# EAGLE board uln_0.02 (EAGLE 8.0.0)
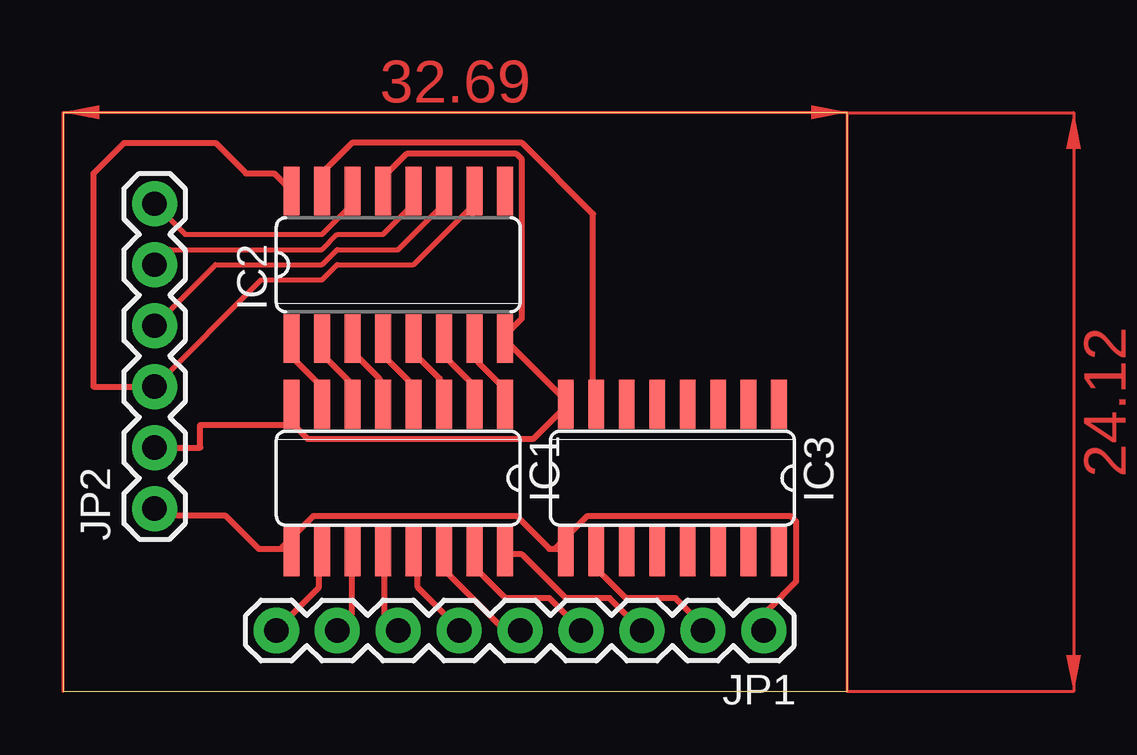
[diagram p0: board, top side]

Size 32.69 x 24.12 mm. Coordinates in mm from the lower left corner, seen from the top.
Outline: 0,0 32.69,0 32.69,24.12 0,24.12 0,0
Copper layers (1*16): Top 0.035mm / dielectric 1.5mm / Bottom 0.035mm
Design rules "SparkFun": minimum track width 8mil, minimum drill 20mil, track to track 8mil, track to pad 8mil, pad to pad 8mil, via to via 8mil, smd to smd 8mil, copper to edge 8mil, drill to drill 8mil, minimum pad ring 12mil, minimum via ring 10mil, stop-mask expansion 4mil, vias tented up to drill 20mil, thermal gap 10mil

## Footprints (pad centres in the part's own frame; a part is rotated, then mirrored left to right if it is on the bottom)
SO16 = smd 0.66 x 2.032: 1 -4.445,-3.073; 2 -3.175,-3.073; 3 -1.905,-3.073; 4 -0.635,-3.073; 5 0.635,-3.073; 6 1.905,-3.073; 7 3.175,-3.073; 8 4.445,-3.073; 9 4.445,3.073; 10 3.175,3.073; 11 1.905,3.073; 12 0.635,3.073; 13 -0.635,3.073; 14 -1.905,3.073; 15 -3.175,3.073; 16 -4.445,3.073
1X09 = drill 1.016 pad 1.88: 1 0,0; 2 2.54,0; 3 5.08,0; 4 7.62,0; 5 10.16,0; 6 12.7,0; 7 15.24,0; 8 17.78,0; 9 20.32,0
1X06 = drill 1.016 pad 1.88: 1 0,0; 2 2.54,0; 3 5.08,0; 4 7.62,0; 5 10.16,0; 6 12.7,0

## Placement (x,y rotation side)
IC1  ULN2003AD  [SO16]  13.97,8.89 180 top
IC2  74HC595D  [SO16]  13.97,17.78 0 top
IC3  ULN2003AD  [SO16]  25.4,8.89 180 top
JP1  M09  [1X09]  29.21,2.54 180 top
JP2  [1X06]  3.81,7.62 90 top

## Library data of the parts
IC1 IC3 = uln-udn
IC2 = 74xx-eu
JP1 JP2 = SparkFun

## Nets
5V: IC2.10 IC2.16 JP2.3
GND: IC1.8 IC2.8 IC2.13 IC3.8 JP2.2
N$1: IC1.7 IC2.1
N$2: IC1.6 IC2.2
N$3: IC1.5 IC2.3
N$4: IC1.4 IC2.4
N$5: IC1.3 IC2.5
N$6: IC1.2 IC2.6
N$7: IC1.1 IC2.7
N$8: IC2.15 IC3.7
N$9: IC1.10 JP1.9
N$10: IC1.11 JP1.8
N$11: IC1.12 JP1.7
N$12: IC1.13 JP1.6
N$13: IC1.14 JP1.5
N$14: IC1.15 JP1.4
N$15: IC1.16 JP1.3
N$16: IC3.10 JP1.2
N$17: IC2.11 JP2.4
N$18: IC2.12 JP2.5
N$19: IC2.14 JP2.6
VCC: IC1.9 IC3.9 JP1.1 JP2.1

## Tracks (layer width: path | path; a pad name or v marks a point on that pad's centre or on a via)
5V
  Top 0.203: JP2.3 8.26,17.14 10.79,17.14 11.43,17.78 14.61,17.78 17.14,20.32 IC2.10
  Top 0.254: JP2.3 1.27,12.7 1.27,21.59 2.54,22.86 6.35,22.86 7.62,21.59 8.79,21.59 IC2.16 | 17.07,19.89 17.07,20.8 IC2.10 17.07,19.89
GND
  Top 0.254: 9.53,12.12 IC1.8 | IC2.13 13.41,21.03 13.41,21.49 14.33,22.4 18.9,22.4 19.13,22.17 19.13,15.54 18.44,14.86 IC2.8 18.44,14.63 20.95,12.12 IC3.8 20.95,11.89 19.58,10.52 10.21,10.52 9.53,11.2 IC1.8 | IC1.8 9.53,11.11 5.71,11.11 5.71,10.16 JP2.2
N$1
  Top 0.254: IC2.1 9.53,13.95 10.67,12.8 10.67,12.12 IC1.7
N$2
  Top 0.254: IC1.6 12.04,12.12 12.04,12.8 10.9,13.95 10.9,14.63 IC2.2
N$3
  Top 0.254: IC1.5 13.18,12.12 13.18,13.03 12.27,13.95 12.27,14.63 IC2.3
N$4
  Top 0.254: IC1.4 14.55,12.12 14.55,12.8 13.41,13.95 13.41,14.63 IC2.4
N$5
  Top 0.254: IC1.3 15.7,12.12 15.7,13.03 14.78,13.95 14.78,14.63 IC2.5
N$6
  Top 0.254: IC2.6 15.93,14.63 15.93,13.95 17.07,12.8 17.07,12.12 IC1.2
N$7
  Top 0.254: IC2.7 17.3,14.63 17.3,13.72 18.21,12.8 18.21,12.12 IC1.1
N$8
  Top 0.254: IC2.15 10.9,21.03 10.9,21.72 12.04,22.86 19.13,22.86 22.1,19.89 22.1,12.12 IC3.7
N$9
  Top 0.254: IC1.10 10.67,5.71 10.67,4.34 9.07,2.74 JP1.9
N$10
  Top 0.254: IC1.11 12.04,5.71 12.04,3.2 11.58,2.74 JP1.8
N$11
  Top 0.254: IC1.12 13.41,5.71 13.41,3.2 13.87,2.74 JP1.7
N$12
  Top 0.254: IC1.13 14.78,5.71 14.78,4.34 16.38,2.74 JP1.6
N$13
  Top 0.254: IC1.14 15.93,5.71 15.93,5.03 18.21,2.74 18.9,2.74 JP1.5
N$14
  Top 0.254: IC1.15 17.3,5.71 17.3,5.03 18.44,3.89 20.27,3.89 21.41,2.74 JP1.4
N$15
  Top 0.254: JP1.3 22.78,3.89 20.95,3.89 19.13,5.71 18.44,5.71 IC1.16
N$16
  Top 0.254: IC3.10 22.33,5.71 22.33,5.03 23.47,3.89 25.53,3.89 26.67,2.74 JP1.2
N$17
  Top 0.203: JP2.4 6.35,17.78 10.79,17.78 11.43,18.41 13.97,18.41 15.88,20.32 IC2.11
  Top 0.254: 15.7,20.12 15.7,20.8 IC2.11 | 3.81,15.32 JP2.4
N$18
  Top 0.203: JP2.5 4.45,18.41 10.79,18.41 11.43,19.05 13.34,19.05 14.61,20.32 IC2.12
  Top 0.254: 14.55,20.12 14.55,20.8 IC2.12
N$19
  Top 0.203: JP2.6 5.08,19.05 10.79,19.05 12.07,20.32 IC2.14
  Top 0.254: 12.04,20.8 IC2.14 | 3.81,20.12 JP2.6
VCC
  Top 0.254: 9.07,5.94 8.15,5.94 6.78,7.32 4.04,7.32 JP2.1 4.13,7.3 | 9.07,5.94 9.53,5.94 IC1.9 | 20.5,5.94 20.27,5.94 18.9,7.32 10.44,7.32 9.07,5.94 | 20.5,5.94 20.95,5.94 IC3.9 | 20.5,5.94 21.87,7.32 30.33,7.32 30.56,7.09 30.56,4.57 29.41,3.43 29.41,2.74 JP1.1
(copper drawn outside any net)
  shapes: Top area x2